# EAGLE board 2DBarcodeScanner-Panel (EAGLE 9.6.2), part 1 of 2
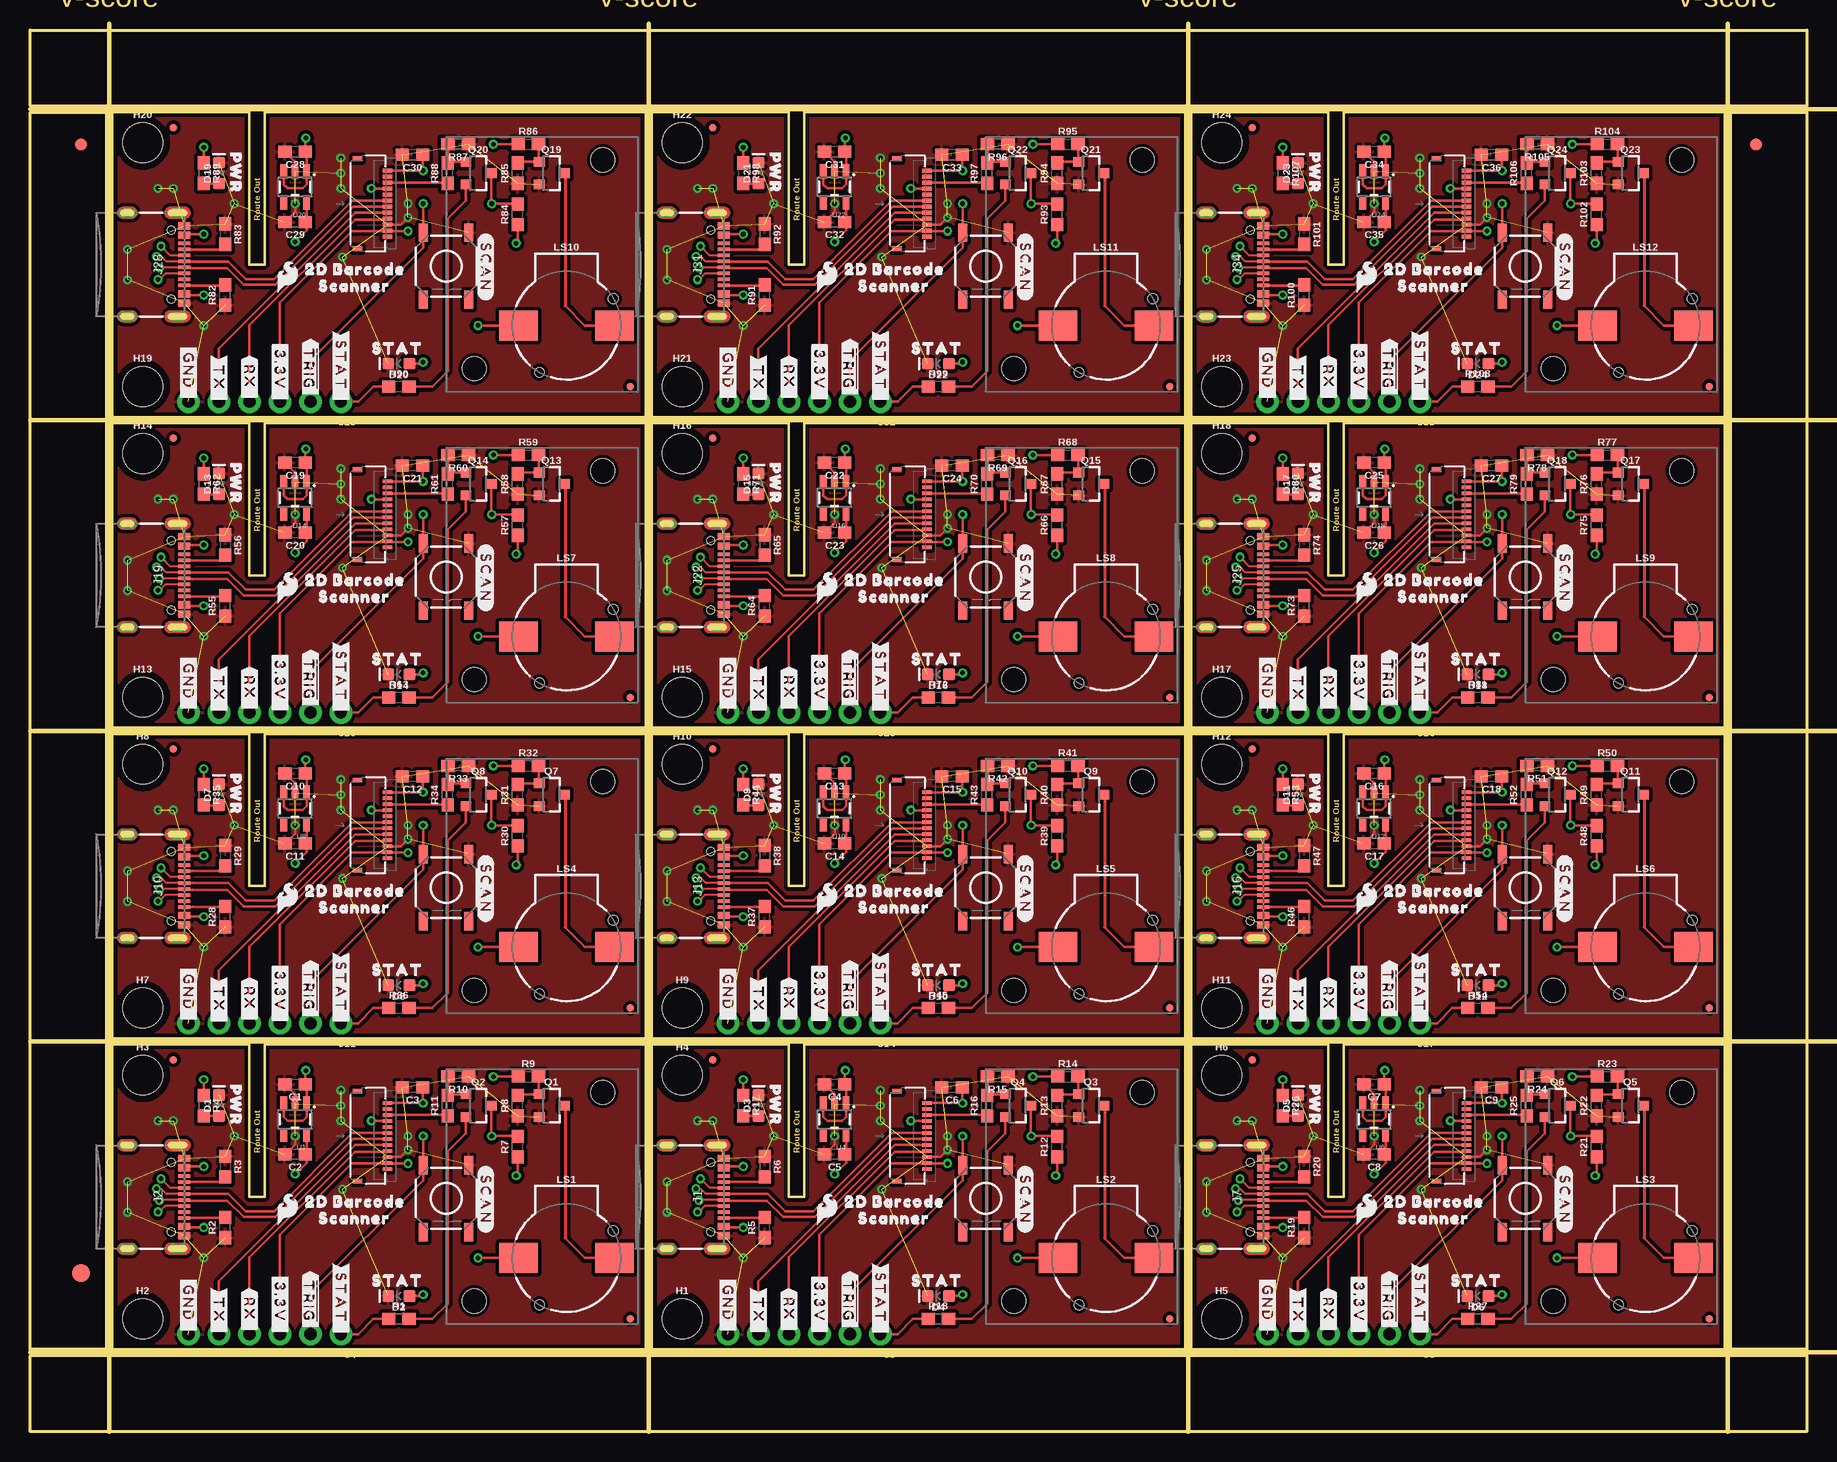
[diagram p0: board, top side]
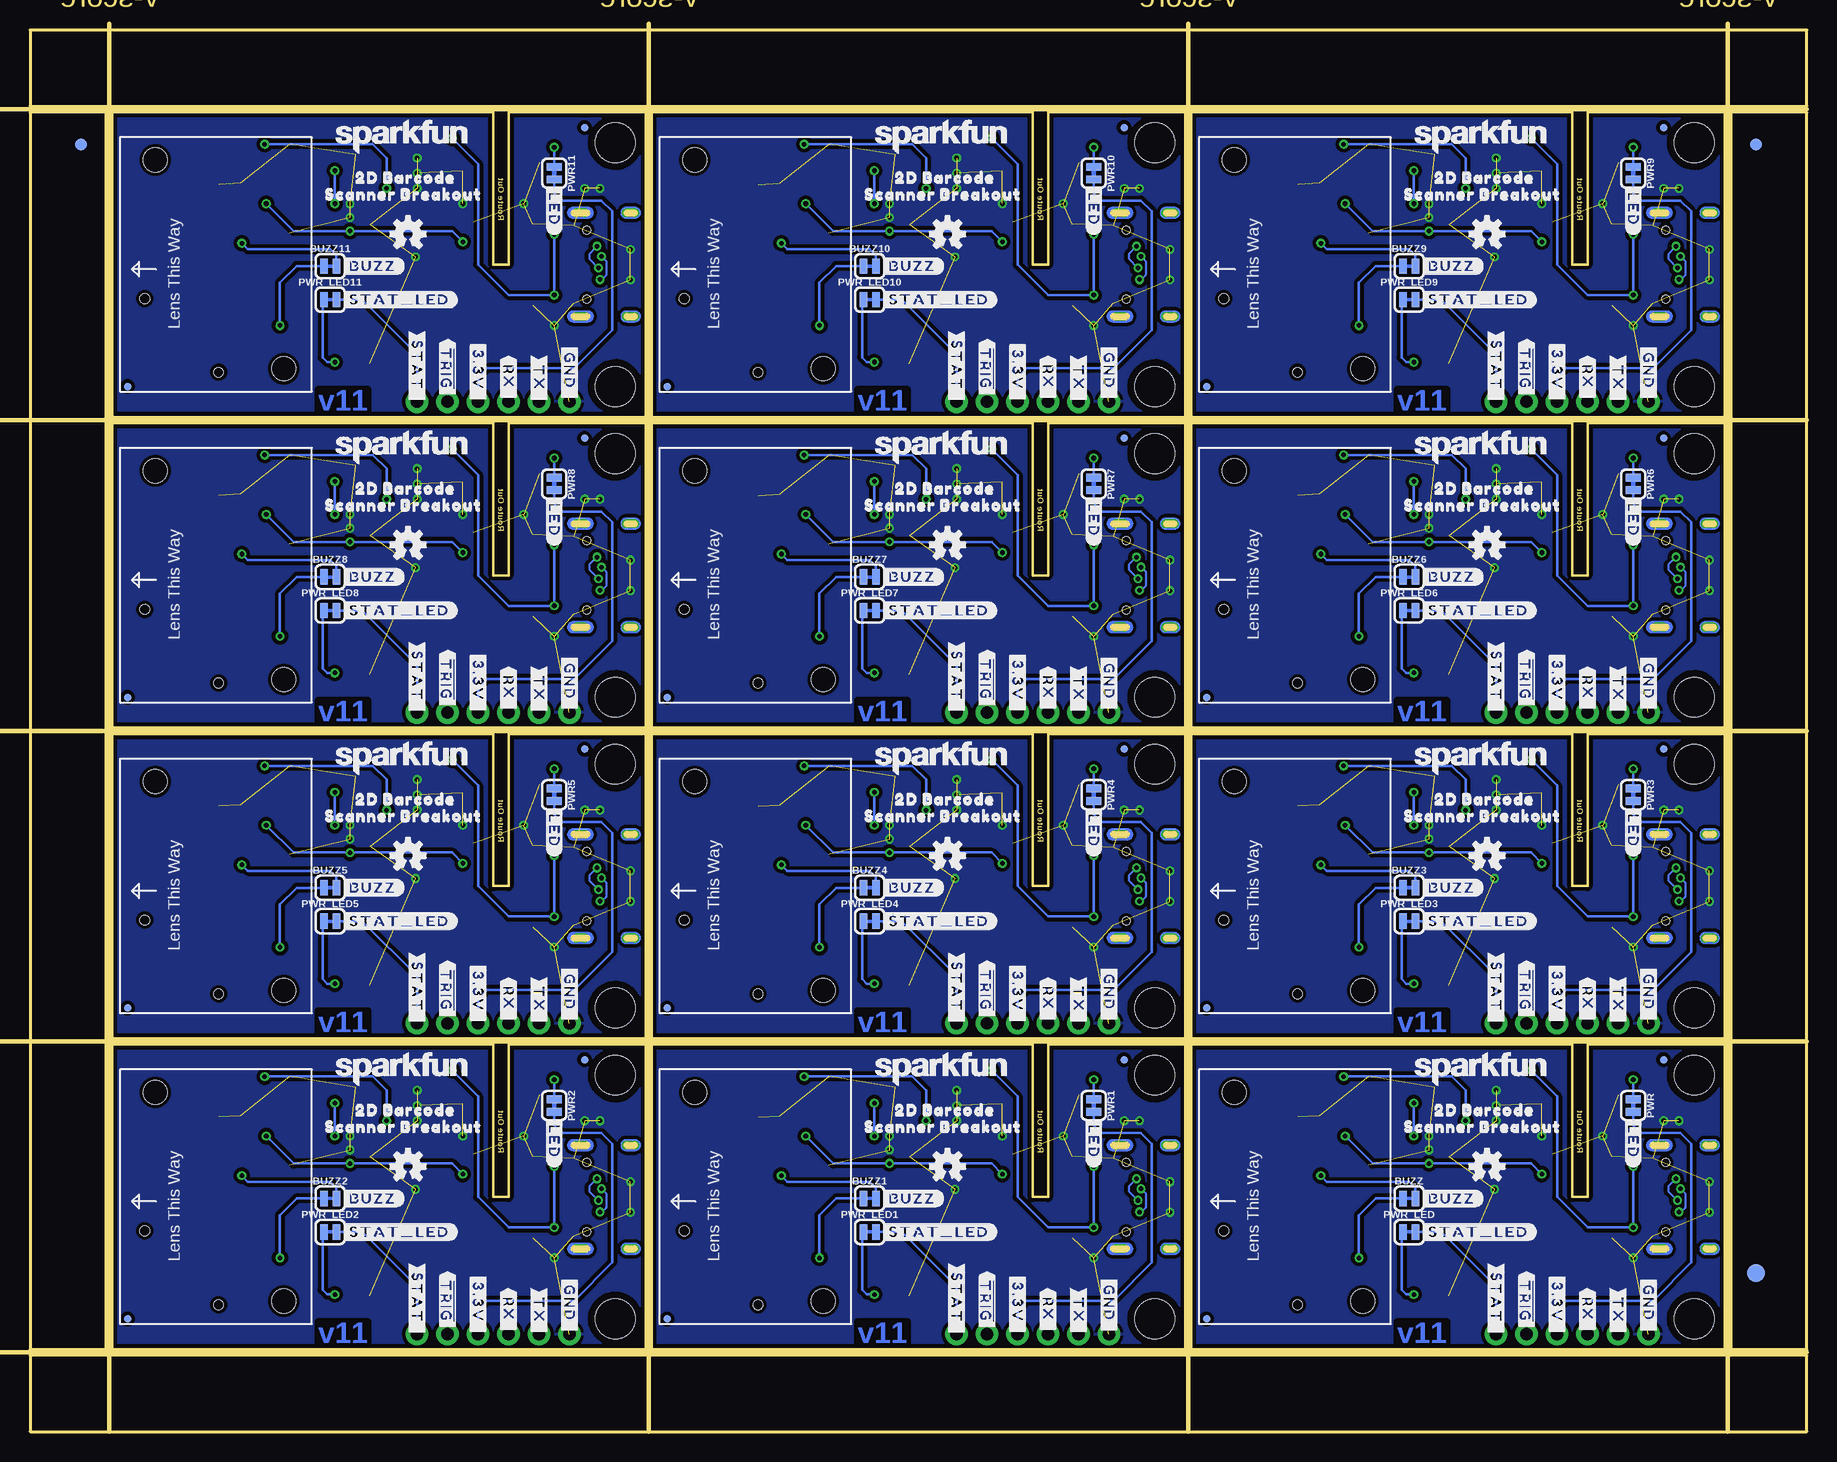
[diagram p1: board, bottom side, seen from below]

Size 148.08 x 116.84 mm. Coordinates in mm from the lower left corner, seen from the top.
Outline: 18.29,32.26 18.29,19.56 19.56,19.56 19.56,32.26 51.31,32.26 51.31,6.86 6.86,6.86 6.86,32.26 18.29,32.26
Outline: 63.25,32.26 63.25,19.56 64.52,19.56 64.52,32.26 96.27,32.26 96.27,6.86 51.82,6.86 51.82,32.26 63.25,32.26
Outline: 108.2,32.26 108.2,19.56 109.47,19.56 109.47,32.26 141.22,32.26 141.22,6.86 96.77,6.86 96.77,32.26 108.2,32.26
Outline: 18.29,58.17 18.29,45.47 19.56,45.47 19.56,58.17 51.31,58.17 51.31,32.77 6.86,32.77 6.86,58.17 18.29,58.17
Outline: 63.25,58.17 63.25,45.47 64.52,45.47 64.52,58.17 96.27,58.17 96.27,32.77 51.82,32.77 51.82,58.17 63.25,58.17
Outline: 108.2,58.17 108.2,45.47 109.47,45.47 109.47,58.17 141.22,58.17 141.22,32.77 96.77,32.77 96.77,58.17 108.2,58.17
Outline: 18.29,84.07 18.29,71.37 19.56,71.37 19.56,84.07 51.31,84.07 51.31,58.67 6.86,58.67 6.86,84.07 18.29,84.07
Outline: 63.25,84.07 63.25,71.37 64.52,71.37 64.52,84.07 96.27,84.07 96.27,58.67 51.82,58.67 51.82,84.07 63.25,84.07
Outline: 108.2,84.07 108.2,71.37 109.47,71.37 109.47,84.07 141.22,84.07 141.22,58.67 96.77,58.67 96.77,84.07 108.2,84.07
Outline: 18.29,109.98 18.29,97.28 19.56,97.28 19.56,109.98 51.31,109.98 51.31,84.58 6.86,84.58 6.86,109.98 18.29,109.98
Outline: 63.25,109.98 63.25,97.28 64.52,97.28 64.52,109.98 96.27,109.98 96.27,84.58 51.82,84.58 51.82,109.98 63.25,109.98
Outline: 108.2,109.98 108.2,97.28 109.47,97.28 109.47,109.98 141.22,109.98 141.22,84.58 96.77,84.58 96.77,109.98 108.2,109.98
Outline: 0,6.35 148.08,6.35 148.08,0 0,0 0,6.35
Outline: 141.73,109.98 148.08,109.98 148.08,6.86 141.73,6.86 141.73,109.98
Outline: 0,116.84 148.08,116.84 148.08,110.49 0,110.49 0,116.84
Outline: 0,109.98 6.35,109.98 6.35,6.86 0,6.86 0,109.98
Copper layers (1*16): Top 0.035mm / dielectric 1.5mm / Bottom 0.035mm
Design rules "2DBarcodeScanner": minimum track width 7mil, minimum drill 0.3mm, track to track 7mil, track to pad 7mil, pad to pad 7mil, via to via 7mil, smd to smd 7mil, copper to edge 7mil, drill to drill 7mil, minimum pad ring 7mil, minimum via ring 7mil, stop-mask expansion 3mil, vias tented up to drill 25mil, thermal gap 10mil
Net classes: 1 power: width 0.178 mm
Milling: 9 lines

## Footprints (pad centres in the part's own frame; a part is rotated, then mirrored left to right if it is on the bottom)
SMT-JUMPER_2_NC_TRACE_SILK = smd 0.66 x 1.27: 1 -0.521,0; 2 0.521,0
0603 = smd 1.1 x 1: 1 -0.85,0; 2 0.85,0
LED-0603 = smd 1 x 1: A -0.877,0; C 0.877,0
FIDUCIAL-1X2 = smd 1 x 1: 1 0,0
FIDUCIAL-1.5X3 = smd 1.5 x 1.5: 1 0,0
FIDUCIAL-MICRO = smd 0.635 x 0.635: 1 0,0
STAND-OFF = hole 3.302: 0,0
USB-C-16P-2LAYER-PADS = smd 0.3 x 1: A5 -1.25,-0.34; A6 -0.25,-0.34; A7 0.25,-0.34; A8 1.25,-0.34; B5 1.75,-0.34; B6 0.75,-0.34; B7 -0.75,-0.34; B8 -1.75,-0.34 | smd 0.6 x 1: GND -3.225,-0.34; GND2 3.225,-0.34; VBUS1 -2.45,-0.34; VBUS2 2.45,-0.34 | drill 0.4 pad 0.6 long: SHLD1 -4.318,-0.915; SHLD2 4.318,-0.915; SHLD3 -4.318,-5.095; SHLD4 4.318,-5.095 | hole 0.65: -2.89,-1.445; 2.89,-1.445
FPC_12_0.5MM = smd 0.3 x 0.8: 1 -2.75,1.35; 2 -2.25,1.35; 3 -1.75,1.35; 4 -1.25,1.35; 5 -0.75,1.35; 6 -0.25,1.35; 7 0.25,1.35; 8 0.75,1.35; 9 1.25,1.35; 10 1.75,1.35; 11 2.25,1.35; 12 2.75,1.35 | smd 0.4 x 0.8: MP1 -3.75,-1.15; MP2 3.75,-1.15
1X06_NO_SILK = drill 1.016 pad 1.88: 1 0,0; 2 2.54,0; 3 5.08,0; 4 7.62,0; 5 10.16,0; 6 12.7,0
BUZZER-CCV = smd 3.2 x 2.5: + 4,0; - -4,0 | hole 0.8: -3.9,-2.25; 2.25,3.9
SOT23-3 = smd 0.8 x 0.9: 1 -0.95,-1; 2 0.95,-1; 3 0,1.1
TACTILE_SWITCH_SMD_5.2MM = smd 1.524 x 0.762: 1 -2.794,1.905; 2 2.794,1.905; 3 -2.794,-1.905; 4 2.794,-1.905
SOT23-5 = smd 0.55 x 1.2: 1 -0.95,-1.3; 2 0,-1.3; 3 0.95,-1.3; 4 0.95,1.3; 5 -0.95,1.3
BARCODE_SCANNER_MOUNT = hole 2: -5.65,8.3; 5.05,-9.1

## Placement (x,y rotation side)
BUZZ  JUMPER-SMT_2_NC_TRACE_SILK  [SMT-JUMPER_2_NC_TRACE_SILK]  33.15,19.43 0 bottom
BUZZ1  JUMPER-SMT_2_NC_TRACE_SILK  [SMT-JUMPER_2_NC_TRACE_SILK]  78.11,19.43 0 bottom
BUZZ2  JUMPER-SMT_2_NC_TRACE_SILK  [SMT-JUMPER_2_NC_TRACE_SILK]  123.06,19.43 0 bottom
BUZZ3  JUMPER-SMT_2_NC_TRACE_SILK  [SMT-JUMPER_2_NC_TRACE_SILK]  33.15,45.34 0 bottom
BUZZ4  JUMPER-SMT_2_NC_TRACE_SILK  [SMT-JUMPER_2_NC_TRACE_SILK]  78.11,45.34 0 bottom
BUZZ5  JUMPER-SMT_2_NC_TRACE_SILK  [SMT-JUMPER_2_NC_TRACE_SILK]  123.06,45.34 0 bottom
BUZZ6  JUMPER-SMT_2_NC_TRACE_SILK  [SMT-JUMPER_2_NC_TRACE_SILK]  33.15,71.25 0 bottom
BUZZ7  JUMPER-SMT_2_NC_TRACE_SILK  [SMT-JUMPER_2_NC_TRACE_SILK]  78.11,71.25 0 bottom
BUZZ8  JUMPER-SMT_2_NC_TRACE_SILK  [SMT-JUMPER_2_NC_TRACE_SILK]  123.06,71.25 0 bottom
BUZZ9  JUMPER-SMT_2_NC_TRACE_SILK  [SMT-JUMPER_2_NC_TRACE_SILK]  33.15,97.16 0 bottom
BUZZ10  JUMPER-SMT_2_NC_TRACE_SILK  [SMT-JUMPER_2_NC_TRACE_SILK]  78.11,97.16 0 bottom
BUZZ11  JUMPER-SMT_2_NC_TRACE_SILK  [SMT-JUMPER_2_NC_TRACE_SILK]  123.06,97.16 0 bottom
C1  1.0uF  [0603]  22.1,28.96 180 top
C2  1.0uF  [0603]  22.1,23.11 180 top
C3  0.1uF  [0603]  31.88,28.7 180 top
C4  1.0uF  [0603]  67.06,28.96 180 top
C5  1.0uF  [0603]  67.06,23.11 180 top
C6  0.1uF  [0603]  76.84,28.7 180 top
C7  1.0uF  [0603]  112.01,28.96 180 top
C8  1.0uF  [0603]  112.01,23.11 180 top
C9  0.1uF  [0603]  121.79,28.7 180 top
C10  1.0uF  [0603]  22.1,54.86 180 top
C11  1.0uF  [0603]  22.1,49.02 180 top
C12  0.1uF  [0603]  31.88,54.61 180 top
C13  1.0uF  [0603]  67.06,54.86 180 top
C14  1.0uF  [0603]  67.06,49.02 180 top
C15  0.1uF  [0603]  76.84,54.61 180 top
C16  1.0uF  [0603]  112.01,54.86 180 top
C17  1.0uF  [0603]  112.01,49.02 180 top
C18  0.1uF  [0603]  121.79,54.61 180 top
C19  1.0uF  [0603]  22.1,80.77 180 top
C20  1.0uF  [0603]  22.1,74.93 180 top
C21  0.1uF  [0603]  31.88,80.52 180 top
C22  1.0uF  [0603]  67.06,80.77 180 top
C23  1.0uF  [0603]  67.06,74.93 180 top
C24  0.1uF  [0603]  76.84,80.52 180 top
C25  1.0uF  [0603]  112.01,80.77 180 top
C26  1.0uF  [0603]  112.01,74.93 180 top
C27  0.1uF  [0603]  121.79,80.52 180 top
C28  1.0uF  [0603]  22.1,106.68 180 top
C29  1.0uF  [0603]  22.1,100.84 180 top
C30  0.1uF  [0603]  31.88,106.43 180 top
C31  1.0uF  [0603]  67.06,106.68 180 top
C32  1.0uF  [0603]  67.06,100.84 180 top
C33  0.1uF  [0603]  76.84,106.43 180 top
C34  1.0uF  [0603]  112.01,106.68 180 top
C35  1.0uF  [0603]  112.01,100.84 180 top
C36  0.1uF  [0603]  121.79,106.43 180 top
D1  RED  [LED-0603]  15.75,27.18 90 top
D2  GREEN  [LED-0603]  30.73,11.3 180 top
D3  RED  [LED-0603]  60.71,27.18 90 top
D4  GREEN  [LED-0603]  75.69,11.3 180 top
D5  RED  [LED-0603]  105.66,27.18 90 top
D6  GREEN  [LED-0603]  120.65,11.3 180 top
D7  RED  [LED-0603]  15.75,53.09 90 top
D8  GREEN  [LED-0603]  30.73,37.21 180 top
D9  RED  [LED-0603]  60.71,53.09 90 top
D10  GREEN  [LED-0603]  75.69,37.21 180 top
D11  RED  [LED-0603]  105.66,53.09 90 top
D12  GREEN  [LED-0603]  120.65,37.21 180 top
D13  RED  [LED-0603]  15.75,78.99 90 top
D14  GREEN  [LED-0603]  30.73,63.12 180 top
D15  RED  [LED-0603]  60.71,78.99 90 top
D16  GREEN  [LED-0603]  75.69,63.12 180 top
D17  RED  [LED-0603]  105.66,78.99 90 top
D18  GREEN  [LED-0603]  120.65,63.12 180 top
D19  RED  [LED-0603]  15.75,104.9 90 top
D20  GREEN  [LED-0603]  30.73,89.03 180 top
D21  RED  [LED-0603]  60.71,104.9 90 top
D22  GREEN  [LED-0603]  75.69,89.03 180 top
D23  RED  [LED-0603]  105.66,104.9 90 top
D24  GREEN  [LED-0603]  120.65,89.03 180 top
E$1  [FIDUCIAL-1X2]  4.23,107.31 0 top
E$2  [FIDUCIAL-1X2]  4.23,107.31 0 bottom
E$3  [FIDUCIAL-1X2]  143.85,107.31 0 top
E$4  [FIDUCIAL-1X2]  143.85,107.31 0 bottom
E$5  [FIDUCIAL-1.5X3]  4.23,13.21 0 top
E$6  [FIDUCIAL-1.5X3]  4.23,13.21 0 bottom
FD1  FIDUCIALUFIDUCIAL  [FIDUCIAL-MICRO]  11.94,30.99 0 top
FD2  FIDUCIALUFIDUCIAL  [FIDUCIAL-MICRO]  50.04,9.4 0 top
FD3  FIDUCIALUFIDUCIAL  [FIDUCIAL-MICRO]  50.04,9.4 0 bottom
FD4  FIDUCIALUFIDUCIAL  [FIDUCIAL-MICRO]  11.94,30.99 0 bottom
FD5  FIDUCIALUFIDUCIAL  [FIDUCIAL-MICRO]  56.9,30.99 0 top
FD6  FIDUCIALUFIDUCIAL  [FIDUCIAL-MICRO]  95,9.4 0 top
FD7  FIDUCIALUFIDUCIAL  [FIDUCIAL-MICRO]  95,9.4 0 bottom
FD8  FIDUCIALUFIDUCIAL  [FIDUCIAL-MICRO]  56.9,30.99 0 bottom
FD9  FIDUCIALUFIDUCIAL  [FIDUCIAL-MICRO]  101.85,30.99 0 top
FD10  FIDUCIALUFIDUCIAL  [FIDUCIAL-MICRO]  139.95,9.4 0 top
FD11  FIDUCIALUFIDUCIAL  [FIDUCIAL-MICRO]  139.95,9.4 0 bottom
FD12  FIDUCIALUFIDUCIAL  [FIDUCIAL-MICRO]  101.85,30.99 0 bottom
FD13  FIDUCIALUFIDUCIAL  [FIDUCIAL-MICRO]  11.94,56.9 0 top
FD14  FIDUCIALUFIDUCIAL  [FIDUCIAL-MICRO]  50.04,35.31 0 top
FD15  FIDUCIALUFIDUCIAL  [FIDUCIAL-MICRO]  50.04,35.31 0 bottom
FD16  FIDUCIALUFIDUCIAL  [FIDUCIAL-MICRO]  11.94,56.9 0 bottom
FD17  FIDUCIALUFIDUCIAL  [FIDUCIAL-MICRO]  56.9,56.9 0 top
FD18  FIDUCIALUFIDUCIAL  [FIDUCIAL-MICRO]  95,35.31 0 top
FD19  FIDUCIALUFIDUCIAL  [FIDUCIAL-MICRO]  95,35.31 0 bottom
FD20  FIDUCIALUFIDUCIAL  [FIDUCIAL-MICRO]  56.9,56.9 0 bottom
FD21  FIDUCIALUFIDUCIAL  [FIDUCIAL-MICRO]  101.85,56.9 0 top
FD22  FIDUCIALUFIDUCIAL  [FIDUCIAL-MICRO]  139.95,35.31 0 top
FD23  FIDUCIALUFIDUCIAL  [FIDUCIAL-MICRO]  139.95,35.31 0 bottom
FD24  FIDUCIALUFIDUCIAL  [FIDUCIAL-MICRO]  101.85,56.9 0 bottom
FD25  FIDUCIALUFIDUCIAL  [FIDUCIAL-MICRO]  11.94,82.8 0 top
FD26  FIDUCIALUFIDUCIAL  [FIDUCIAL-MICRO]  50.04,61.21 0 top
FD27  FIDUCIALUFIDUCIAL  [FIDUCIAL-MICRO]  50.04,61.21 0 bottom
FD28  FIDUCIALUFIDUCIAL  [FIDUCIAL-MICRO]  11.94,82.8 0 bottom
FD29  FIDUCIALUFIDUCIAL  [FIDUCIAL-MICRO]  56.9,82.8 0 top
FD30  FIDUCIALUFIDUCIAL  [FIDUCIAL-MICRO]  95,61.21 0 top
FD31  FIDUCIALUFIDUCIAL  [FIDUCIAL-MICRO]  95,61.21 0 bottom
FD32  FIDUCIALUFIDUCIAL  [FIDUCIAL-MICRO]  56.9,82.8 0 bottom
FD33  FIDUCIALUFIDUCIAL  [FIDUCIAL-MICRO]  101.85,82.8 0 top
FD34  FIDUCIALUFIDUCIAL  [FIDUCIAL-MICRO]  139.95,61.21 0 top
FD35  FIDUCIALUFIDUCIAL  [FIDUCIAL-MICRO]  139.95,61.21 0 bottom
FD36  FIDUCIALUFIDUCIAL  [FIDUCIAL-MICRO]  101.85,82.8 0 bottom
FD37  FIDUCIALUFIDUCIAL  [FIDUCIAL-MICRO]  11.94,108.71 0 top
FD38  FIDUCIALUFIDUCIAL  [FIDUCIAL-MICRO]  50.04,87.12 0 top
FD39  FIDUCIALUFIDUCIAL  [FIDUCIAL-MICRO]  50.04,87.12 0 bottom
FD40  FIDUCIALUFIDUCIAL  [FIDUCIAL-MICRO]  11.94,108.71 0 bottom
FD41  FIDUCIALUFIDUCIAL  [FIDUCIAL-MICRO]  56.9,108.71 0 top
FD42  FIDUCIALUFIDUCIAL  [FIDUCIAL-MICRO]  95,87.12 0 top
FD43  FIDUCIALUFIDUCIAL  [FIDUCIAL-MICRO]  95,87.12 0 bottom
FD44  FIDUCIALUFIDUCIAL  [FIDUCIAL-MICRO]  56.9,108.71 0 bottom
FD45  FIDUCIALUFIDUCIAL  [FIDUCIAL-MICRO]  101.85,108.71 0 top
FD46  FIDUCIALUFIDUCIAL  [FIDUCIAL-MICRO]  139.95,87.12 0 top
FD47  FIDUCIALUFIDUCIAL  [FIDUCIAL-MICRO]  139.95,87.12 0 bottom
FD48  FIDUCIALUFIDUCIAL  [FIDUCIAL-MICRO]  101.85,108.71 0 bottom
H1  STAND-OFF  [STAND-OFF]  54.36,9.4 0 top
H2  STAND-OFF  [STAND-OFF]  9.4,9.4 0 top
H3  STAND-OFF  [STAND-OFF]  9.4,29.72 0 top
H4  STAND-OFF  [STAND-OFF]  54.36,29.72 0 top
H5  STAND-OFF  [STAND-OFF]  99.31,9.4 0 top
H6  STAND-OFF  [STAND-OFF]  99.31,29.72 0 top
H7  STAND-OFF  [STAND-OFF]  9.4,35.31 0 top
H8  STAND-OFF  [STAND-OFF]  9.4,55.63 0 top
H9  STAND-OFF  [STAND-OFF]  54.36,35.31 0 top
H10  STAND-OFF  [STAND-OFF]  54.36,55.63 0 top
H11  STAND-OFF  [STAND-OFF]  99.31,35.31 0 top
H12  STAND-OFF  [STAND-OFF]  99.31,55.63 0 top
H13  STAND-OFF  [STAND-OFF]  9.4,61.21 0 top
H14  STAND-OFF  [STAND-OFF]  9.4,81.53 0 top
H15  STAND-OFF  [STAND-OFF]  54.36,61.21 0 top
H16  STAND-OFF  [STAND-OFF]  54.36,81.53 0 top
H17  STAND-OFF  [STAND-OFF]  99.31,61.21 0 top
H18  STAND-OFF  [STAND-OFF]  99.31,81.53 0 top
H19  STAND-OFF  [STAND-OFF]  9.4,87.12 0 top
H20  STAND-OFF  [STAND-OFF]  9.4,107.44 0 top
H21  STAND-OFF  [STAND-OFF]  54.36,87.12 0 top
H22  STAND-OFF  [STAND-OFF]  54.36,107.44 0 top
H23  STAND-OFF  [STAND-OFF]  99.31,87.12 0 top
H24  STAND-OFF  [STAND-OFF]  99.31,107.44 0 top
J1  [USB-C-16P-2LAYER-PADS]  58.17,19.56 270 top
J2  [USB-C-16P-2LAYER-PADS]  13.21,19.56 270 top
J3  [FPC_12_0.5MM]  28.45,24.64 270 top
J4  [1X06_NO_SILK]  25.91,8.13 180 top
J5  [1X06_NO_SILK]  70.87,8.13 180 top
J6  [FPC_12_0.5MM]  73.41,24.64 270 top
J7  [USB-C-16P-2LAYER-PADS]  103.12,19.56 270 top
J8  [1X06_NO_SILK]  115.82,8.13 180 top
J9  [FPC_12_0.5MM]  118.36,24.64 270 top
J10  [USB-C-16P-2LAYER-PADS]  13.21,45.47 270 top
J11  [1X06_NO_SILK]  25.91,34.04 180 top
J12  [FPC_12_0.5MM]  28.45,50.55 270 top
J13  [USB-C-16P-2LAYER-PADS]  58.17,45.47 270 top
J14  [1X06_NO_SILK]  70.87,34.04 180 top
J15  [FPC_12_0.5MM]  73.41,50.55 270 top
J16  [USB-C-16P-2LAYER-PADS]  103.12,45.47 270 top
J17  [1X06_NO_SILK]  115.82,34.04 180 top
J18  [FPC_12_0.5MM]  118.36,50.55 270 top
J19  [USB-C-16P-2LAYER-PADS]  13.21,71.37 270 top
J20  [1X06_NO_SILK]  25.91,59.94 180 top
J21  [FPC_12_0.5MM]  28.45,76.45 270 top
J22  [USB-C-16P-2LAYER-PADS]  58.17,71.37 270 top
J23  [1X06_NO_SILK]  70.87,59.94 180 top
J24  [FPC_12_0.5MM]  73.41,76.45 270 top
J25  [USB-C-16P-2LAYER-PADS]  103.12,71.37 270 top
J26  [1X06_NO_SILK]  115.82,59.94 180 top
J27  [FPC_12_0.5MM]  118.36,76.45 270 top
J28  [USB-C-16P-2LAYER-PADS]  13.21,97.28 270 top
J29  [1X06_NO_SILK]  25.91,85.85 180 top
J30  [FPC_12_0.5MM]  28.45,102.36 270 top
J31  [USB-C-16P-2LAYER-PADS]  58.17,97.28 270 top
J32  [1X06_NO_SILK]  70.87,85.85 180 top
J33  [FPC_12_0.5MM]  73.41,102.36 270 top
J34  [USB-C-16P-2LAYER-PADS]  103.12,97.28 270 top
J35  [1X06_NO_SILK]  115.82,85.85 180 top
J36  [FPC_12_0.5MM]  118.36,102.36 270 top
LOGO1  OSHW-LOGOS  [OSHW-LOGO-S]  26.67,22.1 0 bottom
LOGO2  SFE_LOGO_FLAME.1_INCH  [SFE_LOGO_FLAME_.1]  21.46,18.54 0 top
LOGO3  SFE_LOGO_NAME.1_INCH  [SFE_LOGO_NAME_.1]  27.18,30.23 0 bottom
LOGO4  OSHW-LOGOS  [OSHW-LOGO-S]  71.63,22.1 0 bottom
LOGO5  SFE_LOGO_FLAME.1_INCH  [SFE_LOGO_FLAME_.1]  66.42,18.54 0 top
LOGO6  SFE_LOGO_NAME.1_INCH  [SFE_LOGO_NAME_.1]  72.14,30.23 0 bottom
LOGO7  OSHW-LOGOS  [OSHW-LOGO-S]  116.59,22.1 0 bottom
LOGO8  SFE_LOGO_FLAME.1_INCH  [SFE_LOGO_FLAME_.1]  111.38,18.54 0 top
LOGO9  SFE_LOGO_NAME.1_INCH  [SFE_LOGO_NAME_.1]  117.09,30.23 0 bottom
LOGO10  OSHW-LOGOS  [OSHW-LOGO-S]  26.67,48.01 0 bottom
LOGO11  SFE_LOGO_FLAME.1_INCH  [SFE_LOGO_FLAME_.1]  21.46,44.45 0 top
LOGO12  SFE_LOGO_NAME.1_INCH  [SFE_LOGO_NAME_.1]  27.18,56.13 0 bottom
LOGO13  OSHW-LOGOS  [OSHW-LOGO-S]  71.63,48.01 0 bottom
LOGO14  SFE_LOGO_FLAME.1_INCH  [SFE_LOGO_FLAME_.1]  66.42,44.45 0 top
LOGO15  SFE_LOGO_NAME.1_INCH  [SFE_LOGO_NAME_.1]  72.14,56.13 0 bottom
LOGO16  OSHW-LOGOS  [OSHW-LOGO-S]  116.59,48.01 0 bottom
LOGO17  SFE_LOGO_FLAME.1_INCH  [SFE_LOGO_FLAME_.1]  111.38,44.45 0 top
LOGO18  SFE_LOGO_NAME.1_INCH  [SFE_LOGO_NAME_.1]  117.09,56.13 0 bottom
LOGO19  OSHW-LOGOS  [OSHW-LOGO-S]  26.67,73.91 0 bottom
LOGO20  SFE_LOGO_FLAME.1_INCH  [SFE_LOGO_FLAME_.1]  21.46,70.36 0 top
LOGO21  SFE_LOGO_NAME.1_INCH  [SFE_LOGO_NAME_.1]  27.18,82.04 0 bottom
LOGO22  OSHW-LOGOS  [OSHW-LOGO-S]  71.63,73.91 0 bottom
LOGO23  SFE_LOGO_FLAME.1_INCH  [SFE_LOGO_FLAME_.1]  66.42,70.36 0 top
LOGO24  SFE_LOGO_NAME.1_INCH  [SFE_LOGO_NAME_.1]  72.14,82.04 0 bottom
LOGO25  OSHW-LOGOS  [OSHW-LOGO-S]  116.59,73.91 0 bottom
LOGO26  SFE_LOGO_FLAME.1_INCH  [SFE_LOGO_FLAME_.1]  111.38,70.36 0 top
LOGO27  SFE_LOGO_NAME.1_INCH  [SFE_LOGO_NAME_.1]  117.09,82.04 0 bottom
LOGO28  OSHW-LOGOS  [OSHW-LOGO-S]  26.67,99.82 0 bottom
LOGO29  SFE_LOGO_FLAME.1_INCH  [SFE_LOGO_FLAME_.1]  21.46,96.27 0 top
LOGO30  SFE_LOGO_NAME.1_INCH  [SFE_LOGO_NAME_.1]  27.18,107.95 0 bottom
LOGO31  OSHW-LOGOS  [OSHW-LOGO-S]  71.63,99.82 0 bottom
LOGO32  SFE_LOGO_FLAME.1_INCH  [SFE_LOGO_FLAME_.1]  66.42,96.27 0 top
LOGO33  SFE_LOGO_NAME.1_INCH  [SFE_LOGO_NAME_.1]  72.14,107.95 0 bottom
LOGO34  OSHW-LOGOS  [OSHW-LOGO-S]  116.59,99.82 0 bottom
LOGO35  SFE_LOGO_FLAME.1_INCH  [SFE_LOGO_FLAME_.1]  111.38,96.27 0 top
LOGO36  SFE_LOGO_NAME.1_INCH  [SFE_LOGO_NAME_.1]  117.09,107.95 0 bottom
LS1  BUZZER-SMD  [BUZZER-CCV]  44.7,14.48 180 top
LS2  BUZZER-SMD  [BUZZER-CCV]  89.66,14.48 180 top
LS3  BUZZER-SMD  [BUZZER-CCV]  134.62,14.48 180 top
LS4  BUZZER-SMD  [BUZZER-CCV]  44.7,40.39 180 top
LS5  BUZZER-SMD  [BUZZER-CCV]  89.66,40.39 180 top
LS6  BUZZER-SMD  [BUZZER-CCV]  134.62,40.39 180 top
LS7  BUZZER-SMD  [BUZZER-CCV]  44.7,66.29 180 top
LS8  BUZZER-SMD  [BUZZER-CCV]  89.66,66.29 180 top
LS9  BUZZER-SMD  [BUZZER-CCV]  134.62,66.29 180 top
LS10  BUZZER-SMD  [BUZZER-CCV]  44.7,92.2 180 top
LS11  BUZZER-SMD  [BUZZER-CCV]  89.66,92.2 180 top
LS12  BUZZER-SMD  [BUZZER-CCV]  134.62,92.2 180 top
PWR  JUMPER-SMT_2_NC_TRACE_SILK  [SMT-JUMPER_2_NC_TRACE_SILK]  14.48,27.18 270 bottom
PWR1  JUMPER-SMT_2_NC_TRACE_SILK  [SMT-JUMPER_2_NC_TRACE_SILK]  59.44,27.18 270 bottom
PWR2  JUMPER-SMT_2_NC_TRACE_SILK  [SMT-JUMPER_2_NC_TRACE_SILK]  104.39,27.18 270 bottom
PWR3  JUMPER-SMT_2_NC_TRACE_SILK  [SMT-JUMPER_2_NC_TRACE_SILK]  14.48,53.09 270 bottom
PWR4  JUMPER-SMT_2_NC_TRACE_SILK  [SMT-JUMPER_2_NC_TRACE_SILK]  59.44,53.09 270 bottom
PWR5  JUMPER-SMT_2_NC_TRACE_SILK  [SMT-JUMPER_2_NC_TRACE_SILK]  104.39,53.09 270 bottom
PWR6  JUMPER-SMT_2_NC_TRACE_SILK  [SMT-JUMPER_2_NC_TRACE_SILK]  14.48,78.99 270 bottom
PWR7  JUMPER-SMT_2_NC_TRACE_SILK  [SMT-JUMPER_2_NC_TRACE_SILK]  59.44,78.99 270 bottom
PWR8  JUMPER-SMT_2_NC_TRACE_SILK  [SMT-JUMPER_2_NC_TRACE_SILK]  104.39,78.99 270 bottom
PWR9  JUMPER-SMT_2_NC_TRACE_SILK  [SMT-JUMPER_2_NC_TRACE_SILK]  14.48,104.9 270 bottom
PWR10  JUMPER-SMT_2_NC_TRACE_SILK  [SMT-JUMPER_2_NC_TRACE_SILK]  59.44,104.9 270 bottom
PWR11  JUMPER-SMT_2_NC_TRACE_SILK  [SMT-JUMPER_2_NC_TRACE_SILK]  104.39,104.9 270 bottom
PWR_LED  JUMPER-SMT_2_NC_TRACE_SILK  [SMT-JUMPER_2_NC_TRACE_SILK]  33.15,16.64 0 bottom
PWR_LED1  JUMPER-SMT_2_NC_TRACE_SILK  [SMT-JUMPER_2_NC_TRACE_SILK]  78.11,16.64 0 bottom
PWR_LED2  JUMPER-SMT_2_NC_TRACE_SILK  [SMT-JUMPER_2_NC_TRACE_SILK]  123.06,16.64 0 bottom
PWR_LED3  JUMPER-SMT_2_NC_TRACE_SILK  [SMT-JUMPER_2_NC_TRACE_SILK]  33.15,42.54 0 bottom
PWR_LED4  JUMPER-SMT_2_NC_TRACE_SILK  [SMT-JUMPER_2_NC_TRACE_SILK]  78.11,42.54 0 bottom
PWR_LED5  JUMPER-SMT_2_NC_TRACE_SILK  [SMT-JUMPER_2_NC_TRACE_SILK]  123.06,42.54 0 bottom
PWR_LED6  JUMPER-SMT_2_NC_TRACE_SILK  [SMT-JUMPER_2_NC_TRACE_SILK]  33.15,68.45 0 bottom
PWR_LED7  JUMPER-SMT_2_NC_TRACE_SILK  [SMT-JUMPER_2_NC_TRACE_SILK]  78.11,68.45 0 bottom
PWR_LED8  JUMPER-SMT_2_NC_TRACE_SILK  [SMT-JUMPER_2_NC_TRACE_SILK]  123.06,68.45 0 bottom
PWR_LED9  JUMPER-SMT_2_NC_TRACE_SILK  [SMT-JUMPER_2_NC_TRACE_SILK]  33.15,94.36 0 bottom
PWR_LED10  JUMPER-SMT_2_NC_TRACE_SILK  [SMT-JUMPER_2_NC_TRACE_SILK]  78.11,94.36 0 bottom
PWR_LED11  JUMPER-SMT_2_NC_TRACE_SILK  [SMT-JUMPER_2_NC_TRACE_SILK]  123.06,94.36 0 bottom
Q1  600mA/40V  [SOT23-3]  43.43,27.18 270 top
Q2  600mA/40V  [SOT23-3]  37.34,27.18 270 top
Q3  600mA/40V  [SOT23-3]  88.39,27.18 270 top
Q4  600mA/40V  [SOT23-3]  82.3,27.18 270 top
Q5  600mA/40V  [SOT23-3]  133.35,27.18 270 top
Q6  600mA/40V  [SOT23-3]  127.25,27.18 270 top
Q7  600mA/40V  [SOT23-3]  43.43,53.09 270 top
Q8  600mA/40V  [SOT23-3]  37.34,53.09 270 top
Q9  600mA/40V  [SOT23-3]  88.39,53.09 270 top
Q10  600mA/40V  [SOT23-3]  82.3,53.09 270 top
Q11  600mA/40V  [SOT23-3]  133.35,53.09 270 top
Q12  600mA/40V  [SOT23-3]  127.25,53.09 270 top
Q13  600mA/40V  [SOT23-3]  43.43,78.99 270 top
Q14  600mA/40V  [SOT23-3]  37.34,78.99 270 top
Q15  600mA/40V  [SOT23-3]  88.39,78.99 270 top
Q16  600mA/40V  [SOT23-3]  82.3,78.99 270 top
Q17  600mA/40V  [SOT23-3]  133.35,78.99 270 top
Q18  600mA/40V  [SOT23-3]  127.25,78.99 270 top
Q19  600mA/40V  [SOT23-3]  43.43,104.9 270 top
Q20  600mA/40V  [SOT23-3]  37.34,104.9 270 top
Q21  600mA/40V  [SOT23-3]  88.39,104.9 270 top
Q22  600mA/40V  [SOT23-3]  82.3,104.9 270 top
Q23  600mA/40V  [SOT23-3]  133.35,104.9 270 top
Q24  600mA/40V  [SOT23-3]  127.25,104.9 270 top
R1  100  [0603]  30.73,9.4 0 top
R2  5.1k  [0603]  16.26,17.02 90 top
R3  5.1k  [0603]  16.26,22.1 270 top
R4  1k  [0603]  14.48,27.18 270 top
R5  5.1k  [0603]  61.21,17.02 90 top
R6  5.1k  [0603]  61.21,22.1 270 top
R7  10  [0603]  40.64,23.75 90 top
R8  10k  [0603]  40.64,27.18 90 top
R9  1k  [0603]  41.53,29.59 0 top
R10  10k  [0603]  35.69,29.59 180 top
R11  1k  [0603]  34.8,27.18 90 top
R12  10  [0603]  85.6,23.75 90 top
R13  10k  [0603]  85.6,27.18 90 top
R14  1k  [0603]  86.49,29.59 0 top
R15  10k  [0603]  80.65,29.59 180 top
R16  1k  [0603]  79.76,27.18 90 top
R17  1k  [0603]  59.44,27.18 270 top
R18  100  [0603]  75.69,9.4 0 top
R19  5.1k  [0603]  106.17,17.02 90 top
R20  5.1k  [0603]  106.17,22.1 270 top
R21  10  [0603]  130.56,23.75 90 top
R22  10k  [0603]  130.56,27.18 90 top
R23  1k  [0603]  131.44,29.59 0 top
R24  10k  [0603]  125.6,29.59 180 top
R25  1k  [0603]  124.71,27.18 90 top
R26  1k  [0603]  104.39,27.18 270 top
R27  100  [0603]  120.65,9.4 0 top
R28  5.1k  [0603]  16.26,42.93 90 top
R29  5.1k  [0603]  16.26,48.01 270 top
R30  10  [0603]  40.64,49.66 90 top
R31  10k  [0603]  40.64,53.09 90 top
R32  1k  [0603]  41.53,55.5 0 top
R33  10k  [0603]  35.69,55.5 180 top
R34  1k  [0603]  34.8,53.09 90 top
R35  1k  [0603]  14.48,53.09 270 top
R36  100  [0603]  30.73,35.31 0 top
R37  5.1k  [0603]  61.21,42.93 90 top
R38  5.1k  [0603]  61.21,48.01 270 top
R39  10  [0603]  85.6,49.66 90 top
R40  10k  [0603]  85.6,53.09 90 top
R41  1k  [0603]  86.49,55.5 0 top
R42  10k  [0603]  80.65,55.5 180 top
R43  1k  [0603]  79.76,53.09 90 top
R44  1k  [0603]  59.44,53.09 270 top
R45  100  [0603]  75.69,35.31 0 top
R46  5.1k  [0603]  106.17,42.93 90 top
R47  5.1k  [0603]  106.17,48.01 270 top
R48  10  [0603]  130.56,49.66 90 top
R49  10k  [0603]  130.56,53.09 90 top
R50  1k  [0603]  131.44,55.5 0 top
R51  10k  [0603]  125.6,55.5 180 top
R52  1k  [0603]  124.71,53.09 90 top
R53  1k  [0603]  104.39,53.09 270 top
R54  100  [0603]  120.65,35.31 0 top
R55  5.1k  [0603]  16.26,68.83 90 top
R56  5.1k  [0603]  16.26,73.91 270 top
R57  10  [0603]  40.64,75.56 90 top
R58  10k  [0603]  40.64,78.99 90 top
R59  1k  [0603]  41.53,81.41 0 top
R60  10k  [0603]  35.69,81.41 180 top
R61  1k  [0603]  34.8,78.99 90 top
R62  1k  [0603]  14.48,78.99 270 top
R63  100  [0603]  30.73,61.21 0 top
R64  5.1k  [0603]  61.21,68.83 90 top
R65  5.1k  [0603]  61.21,73.91 270 top
R66  10  [0603]  85.6,75.56 90 top
R67  10k  [0603]  85.6,78.99 90 top
R68  1k  [0603]  86.49,81.41 0 top
R69  10k  [0603]  80.65,81.41 180 top
R70  1k  [0603]  79.76,78.99 90 top
R71  1k  [0603]  59.44,78.99 270 top
R72  100  [0603]  75.69,61.21 0 top
R73  5.1k  [0603]  106.17,68.83 90 top
R74  5.1k  [0603]  106.17,73.91 270 top
R75  10  [0603]  130.56,75.56 90 top
R76  10k  [0603]  130.56,78.99 90 top
R77  1k  [0603]  131.44,81.41 0 top
R78  10k  [0603]  125.6,81.41 180 top
R79  1k  [0603]  124.71,78.99 90 top
R80  1k  [0603]  104.39,78.99 270 top
R81  100  [0603]  120.65,61.21 0 top
R82  5.1k  [0603]  16.26,94.74 90 top
R83  5.1k  [0603]  16.26,99.82 270 top
R84  10  [0603]  40.64,101.47 90 top
R85  10k  [0603]  40.64,104.9 90 top
R86  1k  [0603]  41.53,107.31 0 top
R87  10k  [0603]  35.69,107.31 180 top
R88  1k  [0603]  34.8,104.9 90 top
R89  1k  [0603]  14.48,104.9 270 top
R90  100  [0603]  30.73,87.12 0 top
R91  5.1k  [0603]  61.21,94.74 90 top
R92  5.1k  [0603]  61.21,99.82 270 top
R93  10  [0603]  85.6,101.47 90 top
R94  10k  [0603]  85.6,104.9 90 top
R95  1k  [0603]  86.49,107.31 0 top
R96  10k  [0603]  80.65,107.31 180 top
R97  1k  [0603]  79.76,104.9 90 top
R98  1k  [0603]  59.44,104.9 270 top
R99  100  [0603]  75.69,87.12 0 top
R100  5.1k  [0603]  106.17,94.74 90 top
R101  5.1k  [0603]  106.17,99.82 270 top
R102  10  [0603]  130.56,101.47 90 top
R103  10k  [0603]  130.56,104.9 90 top
R104  1k  [0603]  131.44,107.31 0 top
R105  10k  [0603]  125.6,107.31 180 top
R106  1k  [0603]  124.71,104.9 90 top
R107  1k  [0603]  104.39,104.9 270 top
R108  100  [0603]  120.65,87.12 0 top
S1  MOMENTARY-SWITCH-SPST-SMD-5.2MM-TALL  [TACTILE_SWITCH_SMD_5.2MM]  79.63,19.43 270 top
S2  MOMENTARY-SWITCH-SPST-SMD-5.2MM-TALL  [TACTILE_SWITCH_SMD_5.2MM]  34.67,19.43 270 top
S3  MOMENTARY-SWITCH-SPST-SMD-5.2MM-TALL  [TACTILE_SWITCH_SMD_5.2MM]  124.59,19.43 270 top
S4  MOMENTARY-SWITCH-SPST-SMD-5.2MM-TALL  [TACTILE_SWITCH_SMD_5.2MM]  34.67,45.34 270 top
S5  MOMENTARY-SWITCH-SPST-SMD-5.2MM-TALL  [TACTILE_SWITCH_SMD_5.2MM]  79.63,45.34 270 top
S6  MOMENTARY-SWITCH-SPST-SMD-5.2MM-TALL  [TACTILE_SWITCH_SMD_5.2MM]  124.59,45.34 270 top
S7  MOMENTARY-SWITCH-SPST-SMD-5.2MM-TALL  [TACTILE_SWITCH_SMD_5.2MM]  34.67,71.25 270 top
S8  MOMENTARY-SWITCH-SPST-SMD-5.2MM-TALL  [TACTILE_SWITCH_SMD_5.2MM]  79.63,71.25 270 top
S9  MOMENTARY-SWITCH-SPST-SMD-5.2MM-TALL  [TACTILE_SWITCH_SMD_5.2MM]  124.59,71.25 270 top
S10  MOMENTARY-SWITCH-SPST-SMD-5.2MM-TALL  [TACTILE_SWITCH_SMD_5.2MM]  34.67,97.16 270 top
S11  MOMENTARY-SWITCH-SPST-SMD-5.2MM-TALL  [TACTILE_SWITCH_SMD_5.2MM]  79.63,97.16 270 top
S12  MOMENTARY-SWITCH-SPST-SMD-5.2MM-TALL  [TACTILE_SWITCH_SMD_5.2MM]  124.59,97.16 270 top
U1  3.3V  [SOT23-5]  22.1,26.04 180 top
U2  BARCODE_SCANNER_MOUNT  [BARCODE_SCANNER_MOUNT]  42.67,19.18 180 bottom
U3  BARCODE_SCANNER_MOUNT  [BARCODE_SCANNER_MOUNT]  87.63,19.18 180 bottom
U4  3.3V  [SOT23-5]  67.06,26.04 180 top
U5  BARCODE_SCANNER_MOUNT  [BARCODE_SCANNER_MOUNT]  132.59,19.18 180 bottom
U6  3.3V  [SOT23-5]  112.01,26.04 180 top
U7  BARCODE_SCANNER_MOUNT  [BARCODE_SCANNER_MOUNT]  42.67,45.08 180 bottom
U8  3.3V  [SOT23-5]  22.1,51.94 180 top
U9  BARCODE_SCANNER_MOUNT  [BARCODE_SCANNER_MOUNT]  87.63,45.08 180 bottom
U10  3.3V  [SOT23-5]  67.06,51.94 180 top
U11  BARCODE_SCANNER_MOUNT  [BARCODE_SCANNER_MOUNT]  132.59,45.08 180 bottom
U12  3.3V  [SOT23-5]  112.01,51.94 180 top
U13  BARCODE_SCANNER_MOUNT  [BARCODE_SCANNER_MOUNT]  42.67,70.99 180 bottom
U14  3.3V  [SOT23-5]  22.1,77.85 180 top
U15  BARCODE_SCANNER_MOUNT  [BARCODE_SCANNER_MOUNT]  87.63,70.99 180 bottom
U16  3.3V  [SOT23-5]  67.06,77.85 180 top
U17  BARCODE_SCANNER_MOUNT  [BARCODE_SCANNER_MOUNT]  132.59,70.99 180 bottom
U18  3.3V  [SOT23-5]  112.01,77.85 180 top
U19  BARCODE_SCANNER_MOUNT  [BARCODE_SCANNER_MOUNT]  42.67,96.9 180 bottom
U20  3.3V  [SOT23-5]  22.1,103.76 180 top
U21  BARCODE_SCANNER_MOUNT  [BARCODE_SCANNER_MOUNT]  87.63,96.9 180 bottom
U22  3.3V  [SOT23-5]  67.06,103.76 180 top
U23  BARCODE_SCANNER_MOUNT  [BARCODE_SCANNER_MOUNT]  132.59,96.9 180 bottom
U24  3.3V  [SOT23-5]  112.01,103.76 180 top
U$1  [##TRIG##0]  23.37,13.34 270 top
U$2  [#STAT_#0]  25.91,13.97 270 top
U$3  [STAT0]  27.81,12.57 0 top
U$4  [#SCAN#0]  37.97,22.1 270 top
U$5  [#BUZZ#0]  32.26,19.43 0 bottom
U$6  [#STAT_LED#0]  32.26,16.64 0 bottom
U$7  [##TRIG##0]  23.37,13.34 270 bottom
U$8  [PWR0]  17.14,29.59 270 top
U$9  [#LED#0]  14.48,26.29 270 bottom
U$10  [#STAT_#0]  70.87,13.97 270 top
U$11  [STAT0]  72.77,12.57 0 top
U$12  [2D_BARCODE0]  67.18,19.18 0 top
U$13  [2D_BARCODE0]  76.71,26.8 0 bottom
U$14  [SCANNER_BREAKOUT0]  79.25,25.4 0 bottom
U$15  [SCANNER0]  68.33,17.78 0 top
U$16  [#STAT_#0]  70.87,13.97 270 bottom
U$17  [2D_BARCODE0]  22.23,19.18 0 top
U$18  [2D_BARCODE0]  31.75,26.8 0 bottom
U$19  [SCANNER0]  23.37,17.78 0 top
U$20  [SCANNER_BREAKOUT0]  34.29,25.4 0 bottom
U$21  [#STAT_#0]  25.91,13.97 270 bottom
U$22  [#3#3V_#0]  65.79,13.21 270 top
U$23  [#3#3V_#0]  65.79,13.21 270 bottom
U$24  [#TX_#0]  60.71,11.94 270 top
U$25  [#TX_#0]  60.71,11.94 270 bottom
U$26  [#TX_#0]  15.75,11.94 270 top
U$27  [#TX_#0]  15.75,11.94 270 bottom
U$28  [#3#3V_#0]  20.83,13.21 270 top
U$29  [#3#3V_#0]  20.83,13.21 270 bottom
U$30  [#RX_#0]  18.29,11.94 270 top
U$31  [#RX_#0]  18.29,11.94 270 bottom
U$32  [#GND_#0]  13.21,12.95 270 top
U$33  [#GND_#0]  13.21,12.95 270 bottom
U$34  [#RX_#0]  63.25,11.94 270 top
U$35  [#RX_#0]  63.25,11.94 270 bottom
U$36  [#GND_#0]  58.17,12.95 270 top
U$37  [#GND_#0]  58.17,12.95 270 bottom
U$38  [#SCAN#0]  82.93,22.1 270 top
U$39  [#BUZZ#0]  77.22,19.43 0 bottom
U$40  [PWR0]  62.1,29.59 270 top
U$41  [#LED#0]  59.44,26.29 270 bottom
U$42  [#STAT_LED#0]  77.22,16.64 0 bottom
U$43  [##TRIG##0]  68.33,13.34 270 top
U$44  [##TRIG##0]  68.33,13.34 270 bottom
U$45  [#STAT_#0]  115.82,13.97 270 top
U$46  [STAT0]  117.73,12.57 0 top
U$47  [2D_BARCODE0]  112.14,19.18 0 top
U$48  [2D_BARCODE0]  121.67,26.8 0 bottom
U$49  [SCANNER_BREAKOUT0]  124.21,25.4 0 bottom
U$50  [SCANNER0]  113.28,17.78 0 top
U$51  [#STAT_#0]  115.82,13.97 270 bottom
U$52  [#3#3V_#0]  110.74,13.21 270 top
U$53  [#3#3V_#0]  110.74,13.21 270 bottom
U$54  [#TX_#0]  105.66,11.94 270 top
U$55  [#TX_#0]  105.66,11.94 270 bottom
U$56  [#RX_#0]  108.2,11.94 270 top
U$57  [#RX_#0]  108.2,11.94 270 bottom
U$58  [#GND_#0]  103.12,12.95 270 top
U$59  [#GND_#0]  103.12,12.95 270 bottom
U$60  [#SCAN#0]  127.89,22.1 270 top
U$61  [#BUZZ#0]  122.17,19.43 0 bottom
U$62  [PWR0]  107.06,29.59 270 top
U$63  [#LED#0]  104.39,26.29 270 bottom
U$64  [#STAT_LED#0]  122.17,16.64 0 bottom
U$65  [##TRIG##0]  113.28,13.34 270 top
U$66  [##TRIG##0]  113.28,13.34 270 bottom
U$67  [#STAT_#0]  25.91,39.88 270 top
U$68  [STAT0]  27.81,38.48 0 top
U$69  [2D_BARCODE0]  22.23,45.08 0 top
U$70  [2D_BARCODE0]  31.75,52.7 0 bottom
U$71  [SCANNER_BREAKOUT0]  34.29,51.31 0 bottom
U$72  [SCANNER0]  23.37,43.69 0 top
U$73  [#STAT_#0]  25.91,39.88 270 bottom
U$74  [#3#3V_#0]  20.83,39.12 270 top
U$75  [#3#3V_#0]  20.83,39.12 270 bottom
U$76  [#TX_#0]  15.75,37.85 270 top
U$77  [#TX_#0]  15.75,37.85 270 bottom
U$78  [#RX_#0]  18.29,37.85 270 top
U$79  [#RX_#0]  18.29,37.85 270 bottom
U$80  [#GND_#0]  13.21,38.86 270 top
U$81  [#GND_#0]  13.21,38.86 270 bottom
U$82  [#SCAN#0]  37.97,48.01 270 top
U$83  [#BUZZ#0]  32.26,45.34 0 bottom
U$84  [PWR0]  17.14,55.5 270 top
U$85  [#LED#0]  14.48,52.2 270 bottom
U$86  [#STAT_LED#0]  32.26,42.54 0 bottom
U$87  [##TRIG##0]  23.37,39.24 270 top
U$88  [##TRIG##0]  23.37,39.24 270 bottom
U$89  [#STAT_#0]  70.87,39.88 270 top
U$90  [STAT0]  72.77,38.48 0 top
U$91  [2D_BARCODE0]  67.18,45.08 0 top
U$92  [2D_BARCODE0]  76.71,52.7 0 bottom
U$93  [SCANNER_BREAKOUT0]  79.25,51.31 0 bottom
U$94  [SCANNER0]  68.33,43.69 0 top
U$95  [#STAT_#0]  70.87,39.88 270 bottom
U$96  [#3#3V_#0]  65.79,39.12 270 top
U$97  [#3#3V_#0]  65.79,39.12 270 bottom
U$98  [#TX_#0]  60.71,37.85 270 top
U$99  [#TX_#0]  60.71,37.85 270 bottom
U$100  [#RX_#0]  63.25,37.85 270 top
U$101  [#RX_#0]  63.25,37.85 270 bottom
U$102  [#GND_#0]  58.17,38.86 270 top
U$103  [#GND_#0]  58.17,38.86 270 bottom
U$104  [#SCAN#0]  82.93,48.01 270 top
U$105  [#BUZZ#0]  77.22,45.34 0 bottom
U$106  [PWR0]  62.1,55.5 270 top
U$107  [#LED#0]  59.44,52.2 270 bottom
U$108  [#STAT_LED#0]  77.22,42.54 0 bottom
U$109  [##TRIG##0]  68.33,39.24 270 top
U$110  [##TRIG##0]  68.33,39.24 270 bottom
U$111  [#STAT_#0]  115.82,39.88 270 top
U$112  [STAT0]  117.73,38.48 0 top
U$113  [2D_BARCODE0]  112.14,45.08 0 top
U$114  [2D_BARCODE0]  121.67,52.7 0 bottom
U$115  [SCANNER_BREAKOUT0]  124.21,51.31 0 bottom
U$116  [SCANNER0]  113.28,43.69 0 top
U$117  [#STAT_#0]  115.82,39.88 270 bottom
U$118  [#3#3V_#0]  110.74,39.12 270 top
U$119  [#3#3V_#0]  110.74,39.12 270 bottom
U$120  [#TX_#0]  105.66,37.85 270 top
U$121  [#TX_#0]  105.66,37.85 270 bottom
U$122  [#RX_#0]  108.2,37.85 270 top
U$123  [#RX_#0]  108.2,37.85 270 bottom
U$124  [#GND_#0]  103.12,38.86 270 top
U$125  [#GND_#0]  103.12,38.86 270 bottom
U$126  [#SCAN#0]  127.89,48.01 270 top
U$127  [#BUZZ#0]  122.17,45.34 0 bottom
U$128  [PWR0]  107.06,55.5 270 top
U$129  [#LED#0]  104.39,52.2 270 bottom
U$130  [#STAT_LED#0]  122.17,42.54 0 bottom
U$131  [##TRIG##0]  113.28,39.24 270 top
U$132  [##TRIG##0]  113.28,39.24 270 bottom
U$133  [#STAT_#0]  25.91,65.79 270 top
U$134  [STAT0]  27.81,64.39 0 top
U$135  [2D_BARCODE0]  22.23,70.99 0 top
U$136  [2D_BARCODE0]  31.75,78.61 0 bottom
U$137  [SCANNER_BREAKOUT0]  34.29,77.22 0 bottom
U$138  [SCANNER0]  23.37,69.6 0 top
U$139  [#STAT_#0]  25.91,65.79 270 bottom
U$140  [#3#3V_#0]  20.83,65.02 270 top
U$141  [#3#3V_#0]  20.83,65.02 270 bottom
U$142  [#TX_#0]  15.75,63.75 270 top
U$143  [#TX_#0]  15.75,63.75 270 bottom
U$144  [#RX_#0]  18.29,63.75 270 top
U$145  [#RX_#0]  18.29,63.75 270 bottom
U$146  [#GND_#0]  13.21,64.77 270 top
U$147  [#GND_#0]  13.21,64.77 270 bottom
U$148  [#SCAN#0]  37.97,73.91 270 top
U$149  [#BUZZ#0]  32.26,71.25 0 bottom
U$150  [PWR0]  17.14,81.41 270 top
U$151  [#LED#0]  14.48,78.11 270 bottom
U$152  [#STAT_LED#0]  32.26,68.45 0 bottom
U$153  [##TRIG##0]  23.37,65.15 270 top
U$154  [##TRIG##0]  23.37,65.15 270 bottom
U$155  [#STAT_#0]  70.87,65.79 270 top
U$156  [STAT0]  72.77,64.39 0 top
U$157  [2D_BARCODE0]  67.18,70.99 0 top
U$158  [2D_BARCODE0]  76.71,78.61 0 bottom
U$159  [SCANNER_BREAKOUT0]  79.25,77.22 0 bottom
U$160  [SCANNER0]  68.33,69.6 0 top
U$161  [#STAT_#0]  70.87,65.79 270 bottom
U$162  [#3#3V_#0]  65.79,65.02 270 top
U$163  [#3#3V_#0]  65.79,65.02 270 bottom
U$164  [#TX_#0]  60.71,63.75 270 top
U$165  [#TX_#0]  60.71,63.75 270 bottom
U$166  [#RX_#0]  63.25,63.75 270 top
U$167  [#RX_#0]  63.25,63.75 270 bottom
U$168  [#GND_#0]  58.17,64.77 270 top
U$169  [#GND_#0]  58.17,64.77 270 bottom
U$170  [#SCAN#0]  82.93,73.91 270 top
U$171  [#BUZZ#0]  77.22,71.25 0 bottom
U$172  [PWR0]  62.1,81.41 270 top
U$173  [#LED#0]  59.44,78.11 270 bottom
U$174  [#STAT_LED#0]  77.22,68.45 0 bottom
U$175  [##TRIG##0]  68.33,65.15 270 top
U$176  [##TRIG##0]  68.33,65.15 270 bottom
U$177  [#STAT_#0]  115.82,65.79 270 top
U$178  [STAT0]  117.73,64.39 0 top
U$179  [2D_BARCODE0]  112.14,70.99 0 top
U$180  [2D_BARCODE0]  121.67,78.61 0 bottom
U$181  [SCANNER_BREAKOUT0]  124.21,77.22 0 bottom
U$182  [SCANNER0]  113.28,69.6 0 top
U$183  [#STAT_#0]  115.82,65.79 270 bottom
U$184  [#3#3V_#0]  110.74,65.02 270 top
U$185  [#3#3V_#0]  110.74,65.02 270 bottom
U$186  [#TX_#0]  105.66,63.75 270 top
U$187  [#TX_#0]  105.66,63.75 270 bottom
U$188  [#RX_#0]  108.2,63.75 270 top
U$189  [#RX_#0]  108.2,63.75 270 bottom
U$190  [#GND_#0]  103.12,64.77 270 top
U$191  [#GND_#0]  103.12,64.77 270 bottom
U$192  [#SCAN#0]  127.89,73.91 270 top
U$193  [#BUZZ#0]  122.17,71.25 0 bottom
U$194  [PWR0]  107.06,81.41 270 top
U$195  [#LED#0]  104.39,78.11 270 bottom
U$196  [#STAT_LED#0]  122.17,68.45 0 bottom
U$197  [##TRIG##0]  113.28,65.15 270 top
U$198  [##TRIG##0]  113.28,65.15 270 bottom
U$199  [#STAT_#0]  25.91,91.69 270 top
U$200  [STAT0]  27.81,90.3 0 top
U$201  [2D_BARCODE0]  22.23,96.9 0 top
U$202  [2D_BARCODE0]  31.75,104.52 0 bottom
U$203  [SCANNER_BREAKOUT0]  34.29,103.12 0 bottom
U$204  [SCANNER0]  23.37,95.5 0 top
U$205  [#STAT_#0]  25.91,91.69 270 bottom
U$206  [#3#3V_#0]  20.83,90.93 270 top
U$207  [#3#3V_#0]  20.83,90.93 270 bottom
U$208  [#TX_#0]  15.75,89.66 270 top
U$209  [#TX_#0]  15.75,89.66 270 bottom
U$210  [#RX_#0]  18.29,89.66 270 top
U$211  [#RX_#0]  18.29,89.66 270 bottom
U$212  [#GND_#0]  13.21,90.68 270 top
U$213  [#GND_#0]  13.21,90.68 270 bottom
U$214  [#SCAN#0]  37.97,99.82 270 top
U$215  [#BUZZ#0]  32.26,97.16 0 bottom
U$216  [PWR0]  17.14,107.31 270 top
U$217  [#LED#0]  14.48,104.01 270 bottom
U$218  [#STAT_LED#0]  32.26,94.36 0 bottom
U$219  [##TRIG##0]  23.37,91.06 270 top
U$220  [##TRIG##0]  23.37,91.06 270 bottom
U$221  [#STAT_#0]  70.87,91.69 270 top
U$222  [STAT0]  72.77,90.3 0 top
U$223  [2D_BARCODE0]  67.18,96.9 0 top
U$224  [2D_BARCODE0]  76.71,104.52 0 bottom
U$225  [SCANNER_BREAKOUT0]  79.25,103.12 0 bottom
U$226  [SCANNER0]  68.33,95.5 0 top
U$227  [#STAT_#0]  70.87,91.69 270 bottom
U$228  [#3#3V_#0]  65.79,90.93 270 top
U$229  [#3#3V_#0]  65.79,90.93 270 bottom
U$230  [#TX_#0]  60.71,89.66 270 top
U$231  [#TX_#0]  60.71,89.66 270 bottom
U$232  [#RX_#0]  63.25,89.66 270 top
U$233  [#RX_#0]  63.25,89.66 270 bottom
U$234  [#GND_#0]  58.17,90.68 270 top
U$235  [#GND_#0]  58.17,90.68 270 bottom
U$236  [#SCAN#0]  82.93,99.82 270 top
U$237  [#BUZZ#0]  77.22,97.16 0 bottom
U$238  [PWR0]  62.1,107.31 270 top
U$239  [#LED#0]  59.44,104.01 270 bottom
U$240  [#STAT_LED#0]  77.22,94.36 0 bottom
U$241  [##TRIG##0]  68.33,91.06 270 top
U$242  [##TRIG##0]  68.33,91.06 270 bottom
U$243  [#STAT_#0]  115.82,91.69 270 top
U$244  [STAT0]  117.73,90.3 0 top
U$245  [2D_BARCODE0]  112.14,96.9 0 top
U$246  [2D_BARCODE0]  121.67,104.52 0 bottom
U$247  [SCANNER_BREAKOUT0]  124.21,103.12 0 bottom
U$248  [SCANNER0]  113.28,95.5 0 top
U$249  [#STAT_#0]  115.82,91.69 270 bottom
U$250  [#3#3V_#0]  110.74,90.93 270 top
U$251  [#3#3V_#0]  110.74,90.93 270 bottom
U$252  [#TX_#0]  105.66,89.66 270 top
U$253  [#TX_#0]  105.66,89.66 270 bottom
U$254  [#RX_#0]  108.2,89.66 270 top
U$255  [#RX_#0]  108.2,89.66 270 bottom
U$256  [#GND_#0]  103.12,90.68 270 top
U$257  [#GND_#0]  103.12,90.68 270 bottom
U$258  [#SCAN#0]  127.89,99.82 270 top
U$259  [#BUZZ#0]  122.17,97.16 0 bottom
U$260  [PWR0]  107.06,107.31 270 top
U$261  [#LED#0]  104.39,104.01 270 bottom
U$262  [#STAT_LED#0]  122.17,94.36 0 bottom
U$263  [##TRIG##0]  113.28,91.06 270 top
U$264  [##TRIG##0]  113.28,91.06 270 bottom

## Library data of the parts
BUZZ BUZZ1-BUZZ11 PWR PWR1-PWR11 PWR_LED PWR_LED1-PWR_LED11 = SparkFun-Jumpers
C1 C2 C4 C5 C7 C8 C10 C11 C13 C14 C16 C17 C19 C20 C22 C23 C25 C26 C28 C29 C31 C32 C34 C35 = SparkFun-Capacitors; PROD_ID: CAP-00868
C3 C6 C9 C12 C15 C18 C21 C24 C27 C30 C33 C36 = SparkFun-Capacitors; PROD_ID: CAP-00810
D1 D3 D5 D7 D9 D11 D13 D15 D17 D19 D21 D23 = SparkFun-LED; PROD_ID: DIO-00819
D2 D4 D6 D8 D10 D12 D14 D16 D18 D20 D22 D24 = SparkFun-LED; PROD_ID: DIO-00821
E$1-E$4 FD1-FD48 LOGO1-LOGO36 = SparkFun-Aesthetics
E$5 E$6 = SparkFun-Retired
H1-H24 = SparkFun-Hardware
J1 J2 J7 J10 J13 J16 J19 J22 J25 J28 J31 J34 = SparkFun-Connectors; PROD_ID: CONN-14122
J3 J6 J9 J12 J15 J18 J21 J24 J27 J30 J33 J36 = SparkFun-Connectors; PROD_ID: CONN-15766
J4 J5 J8 J11 J14 J17 J20 J23 J26 J29 J32 J35 = SparkFun-Connectors; PROD_ID: CONN-08437
LS1-LS12 = SparkFun-Electromechanical; PROD_ID: COMP-08568
Q1-Q24 = SparkFun-DiscreteSemi; PROD_ID: TRANS-08049
R1 R18 R27 R36 R45 R54 R63 R72 R81 R90 R99 R108 = SparkFun-Resistors; PROD_ID: RES-07863
R2 R3 R5 R6 R19 R20 R28 R29 R37 R38 R46 R47 R55 R56 R64 R65 R73 R74 R82 R83 R91 R92 R100 R101 = SparkFun-Resistors; PROD_ID: RES-12083
R4 R9 R11 R14 R16 R17 R23 R25 R26 R32 R34 R35 R41 R43 R44 R50 R52 R53 R59 R61 R62 R68 R70 R71 R77 R79 R80 R86 R88 R89 R95 R97 R98 R104 R106 R107 = SparkFun-Resistors; PROD_ID: RES-07856
R7 R12 R21 R30 R39 R48 R57 R66 R75 R84 R93 R102 = SparkFun-Resistors; PROD_ID: RES-09834
R8 R10 R13 R15 R22 R24 R31 R33 R40 R42 R49 R51 R58 R60 R67 R69 R76 R78 R85 R87 R94 R96 R103 R105 = SparkFun-Resistors; PROD_ID: RES-00824
S1-S12 = SparkFun-Switches; PROD_ID: SWCH-14139
U1 U4 U6 U8 U10 U12 U14 U16 U18 U20 U22 U24 = SparkFun-IC-Power; PROD_ID: VREG-12457
U2 U3 U5 U7 U9 U11 U13 U15 U17 U19 U21 U23 = SparkFun-Hardware; PROD_ID: LPA-14926
U$1-U$264 = output

## Nets
3.3V [power]: C2.1 J3.11 J4.3 PWR.2 Q2.3 R7.2 U1.5
3.3V1 [power]: C5.1 J5.3 J6.11 PWR1.2 Q4.3 R12.2 U4.5
3.3V2 [power]: C8.1 J8.3 J9.11 PWR2.2 Q6.3 R21.2 U6.5
3.3V3 [power]: C11.1 J11.3 J12.11 PWR3.2 Q8.3 R30.2 U8.5
3.3V4 [power]: C14.1 J14.3 J15.11 PWR4.2 Q10.3 R39.2 U10.5
3.3V5 [power]: C17.1 J17.3 J18.11 PWR5.2 Q12.3 R48.2 U12.5
3.3V6 [power]: C20.1 J20.3 J21.11 PWR6.2 Q14.3 R57.2 U14.5
3.3V7 [power]: C23.1 J23.3 J24.11 PWR7.2 Q16.3 R66.2 U16.5
3.3V8 [power]: C26.1 J26.3 J27.11 PWR8.2 Q18.3 R75.2 U18.5
3.3V9 [power]: C29.1 J29.3 J30.11 PWR9.2 Q20.3 R84.2 U20.5
3.3V10 [power]: C32.1 J32.3 J33.11 PWR10.2 Q22.3 R93.2 U22.5
3.3V11 [power]: C35.1 J35.3 J36.11 PWR11.2 Q24.3 R102.2 U24.5
5V: C1.1 J2.VBUS1 J2.VBUS2 U1.1 U1.3
5V1: C4.1 J1.VBUS1 J1.VBUS2 U4.1 U4.3
5V2: C7.1 J7.VBUS1 J7.VBUS2 U6.1 U6.3
5V3: C10.1 J10.VBUS1 J10.VBUS2 U8.1 U8.3
5V4: C13.1 J13.VBUS1 J13.VBUS2 U10.1 U10.3
5V5: C16.1 J16.VBUS1 J16.VBUS2 U12.1 U12.3
5V6: C19.1 J19.VBUS1 J19.VBUS2 U14.1 U14.3
5V7: C22.1 J22.VBUS1 J22.VBUS2 U16.1 U16.3
5V8: C25.1 J25.VBUS1 J25.VBUS2 U18.1 U18.3
5V9: C28.1 J28.VBUS1 J28.VBUS2 U20.1 U20.3
5V10: C31.1 J31.VBUS1 J31.VBUS2 U22.1 U22.3
5V11: C34.1 J34.VBUS1 J34.VBUS2 U24.1 U24.3
!SCAN_TRIGGER!: C3.1 J3.1 J4.2 S2.3
!SCAN_TRIGGER!1: C6.1 J5.2 J6.1 S1.3
!SCAN_TRIGGER!2: C9.1 J8.2 J9.1 S3.3
!SCAN_TRIGGER!3: C12.1 J11.2 J12.1 S4.3
!SCAN_TRIGGER!4: C15.1 J14.2 J15.1 S5.3
!SCAN_TRIGGER!5: C18.1 J17.2 J18.1 S6.3
!SCAN_TRIGGER!6: C21.1 J20.2 J21.1 S7.3
!SCAN_TRIGGER!7: C24.1 J23.2 J24.1 S8.3
!SCAN_TRIGGER!8: C27.1 J26.2 J27.1 S9.3
!SCAN_TRIGGER!9: C30.1 J29.2 J30.1 S10.3
!SCAN_TRIGGER!10: C33.1 J32.2 J33.1 S11.3
!SCAN_TRIGGER!11: C36.1 J35.2 J36.1 S12.3
BUZZER: J3.4 R9.1
BUZZER1: J6.4 R14.1
BUZZER2: J9.4 R23.1
BUZZER3: J12.4 R32.1
BUZZER4: J15.4 R41.1
BUZZER5: J18.4 R50.1
BUZZER6: J21.4 R59.1
BUZZER7: J24.4 R68.1
BUZZER8: J27.4 R77.1
BUZZER9: J30.4 R86.1
BUZZER10: J33.4 R95.1
BUZZER11: J36.4 R104.1
CC1: J1.A5 R6.2
CC2: J1.B5 R5.2
CC3: J2.A5 R3.2
CC4: J2.B5 R2.2
CC5: J7.A5 R20.2
CC6: J7.B5 R19.2
CC7: J10.A5 R29.2
CC8: J10.B5 R28.2
CC9: J13.A5 R38.2
CC10: J13.B5 R37.2
CC11: J16.A5 R47.2
CC12: J16.B5 R46.2
CC13: J19.A5 R56.2
CC14: J19.B5 R55.2
CC15: J22.A5 R65.2
CC16: J22.B5 R64.2
CC17: J25.A5 R74.2
CC18: J25.B5 R73.2
CC19: J28.A5 R83.2
CC20: J28.B5 R82.2
CC21: J31.A5 R92.2
CC22: J31.B5 R91.2
CC23: J34.A5 R101.2
CC24: J34.B5 R100.2
GND [power]: C1.2 C2.2 C3.2 D1.C D2.C J2.GND J2.GND2 J3.10 J4.6 Q1.2 R2.1 R3.1 R8.1 R10.1 S2.1 U1.2
GND1 [power]: C4.2 C5.2 C6.2 D3.C D4.C J1.GND J1.GND2 J5.6 J6.10 Q3.2 R5.1 R6.1 R13.1 R15.1 S1.1 U4.2
GND2 [power]: C7.2 C8.2 C9.2 D5.C D6.C J7.GND J7.GND2 J8.6 J9.10 Q5.2 R19.1 R20.1 R22.1 R24.1 S3.1 U6.2
GND3 [power]: C10.2 C11.2 C12.2 D7.C D8.C J10.GND J10.GND2 J11.6 J12.10 Q7.2 R28.1 R29.1 R31.1 R33.1 S4.1 U8.2
GND4 [power]: C13.2 C14.2 C15.2 D9.C D10.C J13.GND J13.GND2 J14.6 J15.10 Q9.2 R37.1 R38.1 R40.1 R42.1 S5.1 U10.2
GND5 [power]: C16.2 C17.2 C18.2 D11.C D12.C J16.GND J16.GND2 J17.6 J18.10 Q11.2 R46.1 R47.1 R49.1 R51.1 S6.1 U12.2
GND6 [power]: C19.2 C20.2 C21.2 D13.C D14.C J19.GND J19.GND2 J20.6 J21.10 Q13.2 R55.1 R56.1 R58.1 R60.1 S7.1 U14.2
GND7 [power]: C22.2 C23.2 C24.2 D15.C D16.C J22.GND J22.GND2 J23.6 J24.10 Q15.2 R64.1 R65.1 R67.1 R69.1 S8.1 U16.2
GND8 [power]: C25.2 C26.2 C27.2 D17.C D18.C J25.GND J25.GND2 J26.6 J27.10 Q17.2 R73.1 R74.1 R76.1 R78.1 S9.1 U18.2
GND9 [power]: C28.2 C29.2 C30.2 D19.C D20.C J28.GND J28.GND2 J29.6 J30.10 Q19.2 R82.1 R83.1 R85.1 R87.1 S10.1 U20.2
GND10 [power]: C31.2 C32.2 C33.2 D21.C D22.C J31.GND J31.GND2 J32.6 J33.10 Q21.2 R91.1 R92.1 R94.1 R96.1 S11.1 U22.2
GND11 [power]: C34.2 C35.2 C36.2 D23.C D24.C J34.GND J34.GND2 J35.6 J36.10 Q23.2 R100.1 R101.1 R103.1 R105.1 S12.1 U24.2
N$1: BUZZ.2 R7.1
N$2: LS1.- Q1.3
N$3: BUZZ.1 LS1.+
N$4: Q2.2 R1.2
N$5: Q1.1 R8.2 R9.2
N$6: PWR.1 R4.1
N$7: Q2.1 R10.2 R11.2
N$8: D2.A PWR_LED.1
N$9: D1.A R4.2
N$10: LS2.- Q3.3
N$11: Q3.1 R13.2 R14.2
N$12: Q4.2 R18.2
N$13: Q4.1 R15.2 R16.2
N$14: D4.A PWR_LED1.1
N$15: BUZZ1.2 R12.1
N$16: BUZZ1.1 LS2.+
N$17: PWR1.1 R17.1
N$18: D3.A R17.2
N$19: LS3.- Q5.3
N$20: Q5.1 R22.2 R23.2
N$21: Q6.2 R27.2
N$22: Q6.1 R24.2 R25.2
N$23: D6.A PWR_LED2.1
N$24: BUZZ2.2 R21.1
N$25: BUZZ2.1 LS3.+
N$26: PWR2.1 R26.1
N$27: D5.A R26.2
N$28: LS4.- Q7.3
N$29: Q7.1 R31.2 R32.2
N$30: Q8.2 R36.2
N$31: Q8.1 R33.2 R34.2
N$32: D8.A PWR_LED3.1
N$33: BUZZ3.2 R30.1
N$34: BUZZ3.1 LS4.+
N$35: PWR3.1 R35.1
N$36: D7.A R35.2
N$37: LS5.- Q9.3
N$38: Q9.1 R40.2 R41.2
N$39: Q10.2 R45.2
N$40: Q10.1 R42.2 R43.2
N$41: D10.A PWR_LED4.1
N$42: BUZZ4.2 R39.1
N$43: BUZZ4.1 LS5.+
N$44: PWR4.1 R44.1
N$45: D9.A R44.2
N$46: LS6.- Q11.3
N$47: Q11.1 R49.2 R50.2
N$48: Q12.2 R54.2
N$49: Q12.1 R51.2 R52.2
N$50: D12.A PWR_LED5.1
N$51: BUZZ5.2 R48.1
N$52: BUZZ5.1 LS6.+
N$53: PWR5.1 R53.1
N$54: D11.A R53.2
N$55: LS7.- Q13.3
N$56: Q13.1 R58.2 R59.2
N$57: Q14.2 R63.2
N$58: Q14.1 R60.2 R61.2
N$59: D14.A PWR_LED6.1
N$60: BUZZ6.2 R57.1
N$61: BUZZ6.1 LS7.+
N$62: PWR6.1 R62.1
N$63: D13.A R62.2
N$64: LS8.- Q15.3
N$65: Q15.1 R67.2 R68.2
N$66: Q16.2 R72.2
N$67: Q16.1 R69.2 R70.2
N$68: D16.A PWR_LED7.1
N$69: BUZZ7.2 R66.1
N$70: BUZZ7.1 LS8.+
N$71: PWR7.1 R71.1
N$72: D15.A R71.2
N$73: LS9.- Q17.3
N$74: Q17.1 R76.2 R77.2
N$75: Q18.2 R81.2
N$76: Q18.1 R78.2 R79.2
N$77: D18.A PWR_LED8.1
N$78: BUZZ8.2 R75.1
N$79: BUZZ8.1 LS9.+
N$80: PWR8.1 R80.1
N$81: D17.A R80.2
N$82: LS10.- Q19.3
N$83: Q19.1 R85.2 R86.2
N$84: Q20.2 R90.2
N$85: Q20.1 R87.2 R88.2
N$86: D20.A PWR_LED9.1
N$87: BUZZ9.2 R84.1
N$88: BUZZ9.1 LS10.+
N$89: PWR9.1 R89.1
N$90: D19.A R89.2
N$91: LS11.- Q21.3
N$92: Q21.1 R94.2 R95.2
N$93: Q22.2 R99.2
N$94: Q22.1 R96.2 R97.2
N$95: D22.A PWR_LED10.1
N$96: BUZZ10.2 R93.1
N$97: BUZZ10.1 LS11.+
N$98: PWR10.1 R98.1
N$99: D21.A R98.2
N$100: LS12.- Q23.3
N$101: Q23.1 R103.2 R104.2
N$102: Q24.2 R108.2
N$103: Q24.1 R105.2 R106.2
N$104: D24.A PWR_LED11.1
N$105: BUZZ11.2 R102.1
N$106: BUZZ11.1 LS12.+
N$107: PWR11.1 R107.1
N$108: D23.A R107.2
RXI: J3.9 J4.4
RXI1: J5.4 J6.9
RXI2: J8.4 J9.9
RXI3: J11.4 J12.9
RXI4: J14.4 J15.9
RXI5: J17.4 J18.9
RXI6: J20.4 J21.9
RXI7: J23.4 J24.9
RXI8: J26.4 J27.9
RXI9: J29.4 J30.9
RXI10: J32.4 J33.9
RXI11: J35.4 J36.9
STATUS_LED: J3.3 R11.1
STATUS_LED1: J6.3 R16.1
STATUS_LED2: J9.3 R25.1
STATUS_LED3: J12.3 R34.1
STATUS_LED4: J15.3 R43.1
STATUS_LED5: J18.3 R52.1
STATUS_LED6: J21.3 R61.1
STATUS_LED7: J24.3 R70.1
STATUS_LED8: J27.3 R79.1
STATUS_LED9: J30.3 R88.1
STATUS_LED10: J33.3 R97.1
STATUS_LED11: J36.3 R106.1
STATUS_OUT: J4.1 PWR_LED.2 R1.1
STATUS_OUT1: J5.1 PWR_LED1.2 R18.1
STATUS_OUT2: J8.1 PWR_LED2.2 R27.1
STATUS_OUT3: J11.1 PWR_LED3.2 R36.1
STATUS_OUT4: J14.1 PWR_LED4.2 R45.1
STATUS_OUT5: J17.1 PWR_LED5.2 R54.1
STATUS_OUT6: J20.1 PWR_LED6.2 R63.1
STATUS_OUT7: J23.1 PWR_LED7.2 R72.1
STATUS_OUT8: J26.1 PWR_LED8.2 R81.1
STATUS_OUT9: J29.1 PWR_LED9.2 R90.1
STATUS_OUT10: J32.1 PWR_LED10.2 R99.1
STATUS_OUT11: J35.1 PWR_LED11.2 R108.1
TXO: J3.8 J4.5
TXO1: J5.5 J6.8
TXO2: J8.5 J9.8
TXO3: J11.5 J12.8
TXO4: J14.5 J15.8
TXO5: J17.5 J18.8
TXO6: J20.5 J21.8
TXO7: J23.5 J24.8
TXO8: J26.5 J27.8
TXO9: J29.5 J30.8
TXO10: J32.5 J33.8
TXO11: J35.5 J36.8
USB_N: J2.A7 J2.B7 J3.7
USB_N1: J1.A7 J1.B7 J6.7
USB_N2: J7.A7 J7.B7 J9.7
USB_N3: J10.A7 J10.B7 J12.7
USB_N4: J13.A7 J13.B7 J15.7
USB_N5: J16.A7 J16.B7 J18.7
USB_N6: J19.A7 J19.B7 J21.7
USB_N7: J22.A7 J22.B7 J24.7
USB_N8: J25.A7 J25.B7 J27.7
USB_N9: J28.A7 J28.B7 J30.7
USB_N10: J31.A7 J31.B7 J33.7
USB_N11: J34.A7 J34.B7 J36.7
USB_P: J2.A6 J2.B6 J3.6
USB_P1: J1.A6 J1.B6 J6.6
USB_P2: J7.A6 J7.B6 J9.6
USB_P3: J10.A6 J10.B6 J12.6
USB_P4: J13.A6 J13.B6 J15.6
USB_P5: J16.A6 J16.B6 J18.6
USB_P6: J19.A6 J19.B6 J21.6
USB_P7: J22.A6 J22.B6 J24.6
USB_P8: J25.A6 J25.B6 J27.6
USB_P9: J28.A6 J28.B6 J30.6
USB_P10: J31.A6 J31.B6 J33.6
USB_P11: J34.A6 J34.B6 J36.6